# Altium PCB board.PcbDoc
Units mil, origin at the board's own origin, x right, y up, seen from the top; angles counter-clockwise.
Board outline 314.96 x 1874.02 mil, 2 copper layers (Top, Bottom), stack 61.9 mil thick; 26 components, 24 nets, 115 pads, 38 vias.
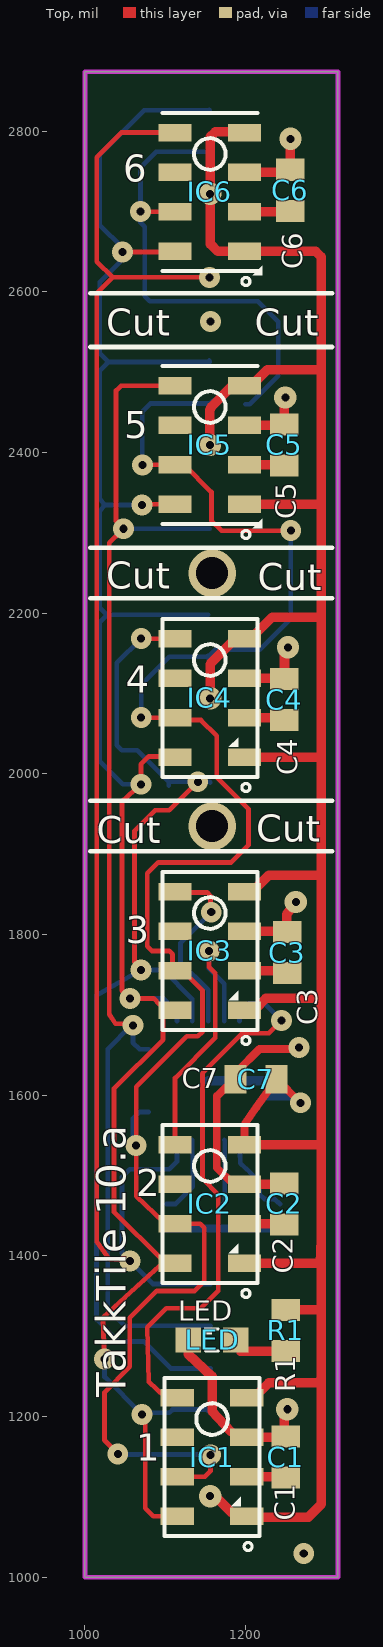
[diagram p0: Top view]
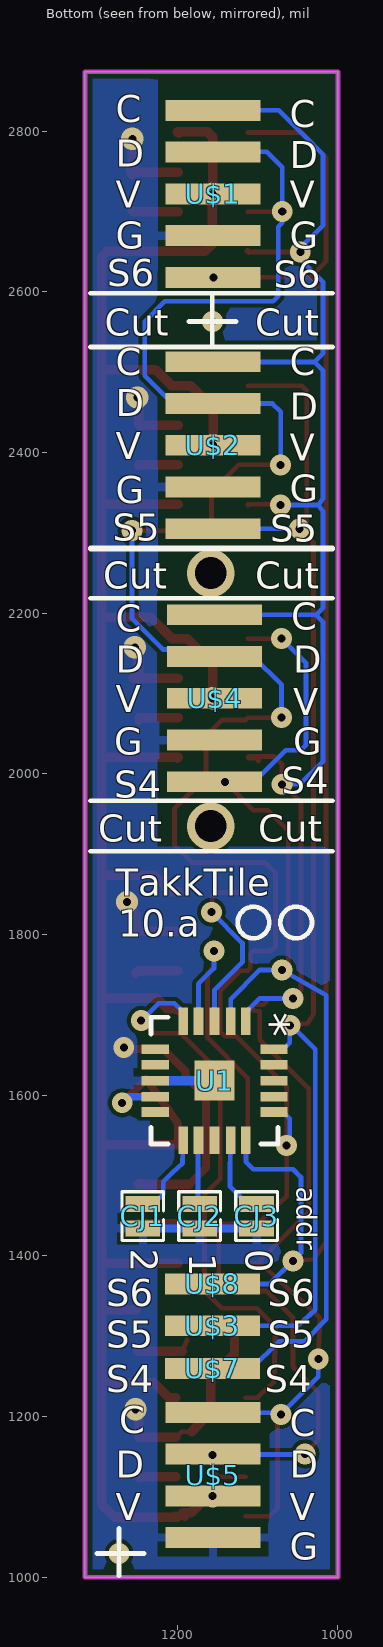
[diagram p1: Bottom view, seen from below]

## Layer stack, top to bottom
Top Solder: solder mask 0.4, Solder Resist, Dk 3.5
Top: signal copper 1.4
Dielectric 1: core 59.1, FR-4, Dk 4.8
Bottom: signal copper 1.4
Bottom Solder: solder mask 0.4, Solder Resist, Dk 3.5

## Board outline
1000,1000 1314.96,1000 1314.96,2874.02 1000,2874.02

## Design rules (kind name [scope] priority, off if disabled: settings)
Clearance [All] p1: gap=5 except(0: SMDPad-SMDPad SMDPad-THPad SMDPad-Via; 6: Track-Via THPad-Via Via-Via)
Clearance "Clearance (Same Net)" [All] p2: gap=0 except(5: SMDPad-SMDPad SMDPad-THPad; 6: SMDPad-Via)
ComponentClearance [All] p1: gap=5 collisioncheckmode=3 verticalgap=5 showdistances=FALSE
HoleSize [All] p1: absolutevalues=TRUE maxlimit=100 minlimit=10 maxpercent=80.000 minpercent=20.000
HoleToHoleClearance mdViaViaSameLayer [All] p1: gap=8 allowstackedmicrovias=TRUE
HoleToHoleClearance [All] p2: gap=10 allowstackedmicrovias=TRUE
MinimumSolderMaskSliver [All] p1: minsoldermaskwidth=1
PasteMaskExpansion mlMinCreamFrame [All] p1: expansion=0
PasteMaskExpansion [All] p2: expansion=0
PolygonConnect ThermalVias [IsVia] p1: connectstyle=Direct reliefconductorwidth=10 reliefentries=4 polygonreliefangle="90 Angle" airgapwidth=10
PolygonConnect [All] p2: connectstyle=Relief reliefconductorwidth=10 reliefentries=4 polygonreliefangle="90 Angle" airgapwidth=10
RoutingVias [All] p1: holewidth=28 width=50 viastyle="Through Hole" minholewidth=10 minwidth=18 maxholewidth=28 maxwidth=50
SilkToSilkClearance [All] p1 off: silktosilkclearance=10
SilkToSolderMaskClearance [IsPad] p1 off: minsilkscreentomaskgap=10 clearancetoexposedcopper=TRUE
SolderMaskExpansion mlMinStopFrame [All] p1: expansion=2
SolderMaskExpansion [All] p2: expansion=4
Width Width_1 [All] p1: maxlimit=100000 minlimit=5 preferedwidth=10
Width [All] p2: maxlimit=10 minlimit=10 preferedwidth=10
23 further rules are at their usual default settings.

## Components (designator, comment, footprint, x,y, rotation, side; value= is the part's Value field where it differs from the comment)
C1 "1uF" C0402 1250.03,1149.61 r90 top
C2 "1uF" C0402 1248.03,1464.57 r90 top
C3 "1uF" C0402 1251.97,1777.56 r90 top
C4 "1uF" C0402 1248.03,2092.52 r90 top
C5 "1uF" C0402 1248.03,2409.45 r90 top
C6 "1uF" C0402 1255.91,2726.38 r90 top
C7 "4.7uf" C0402 1212.99,1620.08 r180 top
CJ1 "" 2_P 1242.92,1464.57 r0 bottom
CJ2 "" 2_P 1172.05,1464.57 r0 bottom
CJ3 "" 2_P 1101.18,1464.57 r0 bottom
IC1 "MPL115A2" MPL115A2 1158.27,1196.85 r180 top
IC2 "MPL115A2" MPL115A2 1155.51,1511.81 r180 top
IC3 "MPL115A2" MPL115A2 1155.51,1826.77 r180 top
IC4 "MPL115A2" MPL115A2 1155.51,2141.73 r180 top
IC5 "MPL115A2" MPL115A2 1155.51,2456.69 r180 top
IC6 "MPL115A2" MPL115A2 1155.51,2771.65 r180 top
LED "" SML0603 1158.27,1295.28 r0 top
R1 "120R" R0402 1250.22,1307.09 r90 top
U1 "ATTINY24A-MU-QFN20" QFN50P400X400X80-21N 1153.55,1618.11 r270 bottom
U$1 "" 5_PIN_CON 1155.51,2618.11 r180 bottom
U$2 "" 5_PIN_CON 1155.51,2305.12 r180 bottom
U$3 "" 1_PIN_CON 1156.3,1312.99 r180 bottom
U$4 "" 5_PIN_CON 1153.55,1990.16 r180 bottom
U$5 "" 4_PIN_CON 1155.51,1049.21 r180 bottom
U$7 "" 1_PIN_CON 1156.3,1259.84 r180 bottom
U$8 "1_PIN_CON" 1_PIN_CON 1156.3,1365 r180 bottom

## Footprints (in the part's own frame and the unit in brackets; to place one, negate y for a bottom-side part, rotate by r counter-clockwise, add the part's x,y. Pads: shape width x height; smd on the part's side, far side on the other; paste and mask are expansions set on the pad)
1_PIN_CON [mm] "1_PIN_CON"
  rect 3x0.66 smd: 1(0,0)
2_P [mil] "2_P"
  rect 43.31x19.69 smd: P$1(0,0) P$2(0,30.51)
  silkscreen extent -26,-15 26,45
4_PIN_CON [mm] "4_PIN_CON"
  rect 3x0.66 smd: 1(0,3.96) 2(0,2.64) 3(0,1.32) 4(0,0)
5_PIN_CON [mm] "5_PIN_CON"
  rect 3x0.66 smd: 1(0,5.28) 2(0,3.96) 3(0,2.64) 4(0,1.32) 5(0,0)
C0402 [mm] "C0402"
  rect 0.7x0.9 smd: 1(-0.65,0) 2(0.65,0)
MPL115A2 [mm] "MPL115A2"
  rect 1.05x0.55 smd: 1(-1.1,3.075) 2(-1.1,1.825) 3(-1.1,0.575) 4(-1.1,-0.675) 5(1.1,-0.675) 6(1.1,0.575) 7(1.1,1.825) 8(1.1,3.075)
  silkscreen extent -1.5,-1.3 1.5,4.16
QFN50P400X400X80-21N [mil] "QFN50P400X400X80-21N"
  rect 34x12 smd: 1(-74,39) 2(-74,20) 3(-74,0) 4(-74,-20) 5(-74,-39) 11(74,-39) 12(74,-20) 13(74,0) 14(74,20) 15(74,39)
  rect 12x34 smd: 6(-39,-74) 7(-20,-74) 8(0,-74) 9(20,-74) 10(39,-74) 16(39,74) 17(20,74) 18(0,74) 19(-20,74) 20(-39,74)
  rect 50x50 smd: 21(0,0)
  silkscreen extent -79,-79 79,79
R0402 [mm] "R0402"
  rect 0.7x0.9 smd: 1(-0.65,0) 2(0.65,0)
SML0603 [mil] "SML0603"
  rect 31.5x31.5 smd: A(29.53,0) C(-29.53,0)
  silkscreen extent -10,-14 8,16

## Part data
C1 C2 C3 C4 C5 C6 C7: library part C0402
CJ1 CJ2 CJ3: library part 2_P
LED: library part SML0603
R1: library part R0402
U1: library part QFN50P400X400X80-21N
U$1 U$2 U$4: library part 5_PIN_CON
U$3 U$7: library part 1_PIN_CON
U$5: library part 4_PIN_CON

## Via types
v1: diameter 26/26 (per signal layer), hole 10, Top to Bottom, tented both sides, 27 vias
v2: diameter 27.81/27.81 (per signal layer), hole 10, Top to Bottom, tented both sides, 9 vias
v3: diameter 59.05/59.05 (per signal layer), hole 39.37, Top to Bottom, 2 vias

## Nets (pads, with @x,y where several pads share a name; then routed paths per layer and width w, separated by ;. In a path a pad name is that pad's centre, name@x,y a point inside that pad or via, vN(x,y) a via of type N, cw(c..) or ccw(c..) an arc to the next point about the centre after c; other vN are vias at no path point)
GND: C1.2 C2.2 C3.2 C4.2 C5.2 C6.2 C7.2 CJ1.P$2 CJ2.P$2 CJ3.P$2 IC1.3 IC2.3 IC3.3 IC4.3 IC5.3 IC6.3 LED.C U1.8 U1.21 U$1.4 U$2.4 U$4.4 U$5.4 | length 1199.4
  Top w5.91: IC1.3@1181.89,1181.1 1194.69,1181.1 IC1.3
  Top w9.84: IC2.3@1184.85,1489.17 1164.18,1509.84 1164.18,1598.82 1164.57,1598.82 C7.2@1189.77,1624.02 ; C7.2 1189.77,1622.44 C7.2@1189.77,1624.02 ; v1(1266.54,1659.45) 1264.57,1657.48 1217.33,1657.48 1189.77,1629.92 C7.2@1189.77,1624.02
  Top w11.81: LED.C 1128.74,1277.56 1158.27,1250 1158.27,1206.69 IC1.3@1181.89,1181.1 ; IC2.3@1184.85,1489.17 IC2.3 1249.02,1489.17 C2.2 ; IC3.3 C3.2@1249.02,1804.13 ; IC4.3 1247.05,2119.09 C4.2 ; IC5.3@1198.82,2434.06 1247.05,2434.06 C5.2 1248.03,2462.99 v2(1249.61,2468.5) ; IC6.3 C6.2@1252.96,2749.02 ; IC1.3 1247.05,1174.21 1248.03,1175.2 1248.03,1205.12 v2(1251.97,1209.06) ; v2(1252.76,2157.48) v2@1249.02,2153.74 ; C4.2@1254.92,2119.09 C4.2@1249.02,2119.09 ; C6.2@1255.91,2746.06 C6.2@1252.96,2749.02 ; v2(1255.91,2790.55) C6.2 C6.2@1252.96,2749.02 ; C3.2@1256.11,1804.13 C3.2@1250.99,1804.13 ; v2(1262.6,1840.55) 1250.99,1825 C3.2@1250.99,1804.13 ; C4.2 1248.03,2152.76 v2@1249.02,2153.74 ; C4.2 C4.2@1249.02,2119.09 ; C3.2@1249.02,1804.13 C3.2@1250.99,1804.13 ; C3.2@1249.02,1804.13 C3.2 C3.2@1250.99,1804.13 ; C4.2@1249.02,2119.09 v2@1249.02,2153.74
  Top w16: C6.2@1255.91,2749.02 C6.2
  Bottom w9.84: CJ3.P$2 CJ2.P$2 CJ1.P$2
  Bottom w11.81: U1.21 U1.8 ; v2@1255.51,2790.16 v2(1255.91,2790.55)
N$1: C1.1 IC1.2 | length 46.9
  Top w11.81: IC1.2 1247.05,1125 C1.1@1248.03,1124.02
N$2: C5.1 IC5.2 | length 49.6
  Top w11.81: IC5.2 1247.05,2384.84 C5.1
N$3: C2.1 IC2.2 | length 49.6
  Top w11.81: IC2.2 1247.05,1439.96 C2.1
N$4: C6.1 IC6.2 | length 57.5
  Top w11.81: IC6.2 1254.92,2699.8 C6.1
N$5: C3.1 IC3.2 | length 54
  Top w11.81: IC3.2 1247.05,1754.92 C3.1
N$6: CJ3.P$1 U1.14 | length 100.2
  Bottom w5.91: CJ3.P$1 1112.99,1464.57 1134.33,1485.91 1134.33,1507.56 U1.14
N$7: C4.1 IC4.2 | length 51.3
  Top w11.81: IC4.2 1247.05,2069.88 C4.1
N$8: CJ2.P$1 U1.12 | length 80.6
  Bottom w5.91: CJ2.P$1 1174.02,1466.54 1174.02,1543.8 U1.12
N$9: CJ1.P$1 U1.11 | length 108
  Bottom w5.91: U1.11 1193.33,1515.33 1205.51,1503.94 1217.33,1492.13 1217.33,1476.77 1223.23,1470.87 1235.83,1470.87 CJ1.P$1
N$10: 
N$11: LED.A R1.1 | length 70.9
  Top w5.91: LED.A LED.A@1193.7,1281.1
  Top w11.81: LED.A@1193.7,1281.1 R1.1@1249.22,1281.5
N$12: 
N$13: 
RESET: U1.13
RST01: IC1.5 U1.5 | length 704.2
  Top w5.91: IC1.5@1112.4,1223.23 IC1.5 1099.22,1223.43 1099.22,1224.41 1079.53,1243.11 1077.56,1311.02 1101.18,1334.65 1144.49,1334.65 1166.14,1356.3 1166.14,1476.38 1146.46,1496.06 1146.46,1627.95 1195.67,1677.17 1229.14,1677.17 v1(1244.88,1692.91)
  Bottom w5.91: U1.5 1192.55,1703.57 1203.55,1714.57 1223.23,1714.57 v1(1244.88,1692.91)
RST02: IC2.5 U1.4 | length 362.5
  Top w5.91: IC2.5 1112.21,1621.26 1162.21,1671.26 1162.21,1751.97 1154.33,1759.84 v1(1154.33,1779.53)
  Bottom w5.91: v1@1154.33,1781.5 v1(1154.33,1779.53) 1154.33,1757.87 1173.55,1738.66 U1.4
RST03: IC3.5 U1.3 | length 256.4
  Top w5.91: IC3.5@1101.97,1852.36 1152.36,1852.36 1156.3,1848.43 1156.3,1828.74 v1(1157.29,1827.76)
  Top w7.87: IC3.5@1101.97,1852.36 1111.22,1852.36 IC3.5@1112.21,1853.35
  Bottom w5.91: U1.3 1153.55,1731.1 1118.9,1765.75 1118.9,1789.37 v1(1157.29,1827.76) ; v1@1156.3,1826.77 v1(1157.29,1827.76) ; v1@1158.27,1828.74 v1(1157.29,1827.76)
RST04: IC4.5 U1.2 U$4.5 U$7.1 | length 1362.3
  Top w5.91: v1(1069.69,1755.91) 1069.69,1757.87 1061.81,1765.75 1061.81,1929.13 1087.4,1954.72 1105.12,1954.72 v1(1140.55,1990.16) ; v1(1070.08,2168.5) 1070.28,2168.31 IC4.5
  Bottom w5.91: v1(1070.08,2168.5) 1039.77,2138.19 1039.77,2035.83 1046.07,2029.53 1064.96,2029.53 U$4.5@1104.33,1990.16 ; U$4.5@1104.33,1985.43 U$4.5@1104.33,1990.16 ; U1.2 1133.55,1719.61 1097.25,1755.91 v1(1069.69,1755.91) 1014.57,1724.41 1014.57,1320.87 1042.13,1293.31 1073.62,1293.31 1107.09,1259.84 U$7.1 ; U$4.5@1155.91,1989.37 1155.12,1990.16 U$4.5 ; U$4.5@1104.33,1990.16 v1(1140.55,1990.16) ; v1(1140.55,1990.16) 1140.55,1990.94 U$4.5 ; v1(1140.55,1990.16) U$4.5
RST05: IC5.5 U1.20 U$2.5 U$3.1 | length 1568.4
  Top w5.91: 1038.19,2295.28 v1(1048.03,2305.12) ; v1(1059.85,1687.01) 1057.88,1688.98 1038.19,1688.98 1030.32,1700.79 1030.32,2287.4 v1(1048.03,2305.12) ; IC5.5 1045,2483.27 1038.82,2477.09 1038.82,2314.33 v1(1048.03,2305.12)
  Bottom w5.91: v1(1048.03,2305.12) U$2.5 ; v1@1057.88,1687.01 1028.35,1657.48 1028.35,1332.68 1050,1312.99 U$3.1 ; v1(1059.85,1687.01) 1059.85,1665.35 1068.09,1657.11 U1.20
RST06: IC6.5 U1.15 U$1.5 U$8.1 | length 1977
  Top w5.91: v1(1055.91,1393.7) 1030.63,1395.67 1014.88,1417.32 1014.88,2598.43 1034.57,2618.11 ; IC6.5 1112.01,2798.43 1045.59,2798.43 1014.88,2767.72 1014.88,2637.8 1034.57,2618.11 ; v1(1155.12,2618.11) 1034.57,2618.11
  Bottom w5.91: U1.15 1114.55,1517.3 1105.12,1507.87 1055.91,1507.87 1046.07,1498.03 1046.07,1403.54 v1(1055.91,1393.7) 1084.61,1365 U$8.1 ; v1(1155.12,2618.11) 1155.51,2616.93 U$1.5 U$1.5@1156.3,2617.32
SCL: IC1.8 IC2.8 IC3.8 IC4.8 IC5.8 IC6.8 U1.1 U$1.1 U$2.1 U$4.1 U$5.1 | length 2878.3
  Top w5.91: v1(1024.41,1271.65) 1022.44,1322.83 1050,1348.43 1093.31,1387.8 1109.06,1389.57 IC2.8 1105.32,1390.75 1095.48,1393.5 1097.25,1393.7 1036.22,1454.72 1036.22,1608.27 1097.25,1669.29 1097.25,1704.53 IC3.8 ; v1(1046.85,2649.61) IC6.8@1111.22,2649.61 ; v1@1068.51,1981.1 v1(1069.69,1987.01) ; v1(1071.26,2334.65) 1072.25,2335.63 IC5.8 1111.22,2334.65 IC5.8@1111.81,2334.65 ; v1@1075.2,1202.36 v1(1070.87,1202.76) 1075.2,1198.43 1075.2,1085.83 1085.24,1075.79 IC1.8 ; IC4.8@1098.82,2016.14 1098.82,2019.69 1111.22,2019.69 IC4.8 ; IC4.8@1100.99,2020.67 IC4.8 ; IC3.8@1105.12,1706.69 1111.22,1706.69 IC3.8 ; IC3.8@1112.99,1704.92 IC3.8 ; v1(1069.69,1987.01) 1069.69,2011.81 1079.53,2021.65 1111.22,2021.65 IC4.8 ; v1(1069.69,1987.01) 1046.07,1965.35 1046.07,1730.32 v1(1055.91,1720.47) 1085.44,1720.47 1093.21,1712.7 1105.22,1712.7 IC3.8
  Top w7.87: IC6.8@1111.22,2649.61 IC6.8
  Bottom w5.91: v1(1024.41,1271.65) 1024.41,1249.21 v1(1070.87,1202.76) 1072.84,1204.72 1105.12,1204.72 1109.06,1208.66 1151.97,1208.66 U$5.1 U$5.1@1156.3,1205.91 ; v1(1055.91,1720.47) 1097.44,1720.47 1114.55,1703.37 U1.1 ; v1(1069.69,1987.01) 1047.25,1987.01 1018.51,2015.75 1018.51,2188.98 1027.56,2198.03 ; v1@1071.66,2334.65 v1(1071.26,2334.65) 1024.41,2334.65 ; U$4.1 1027.56,2198.03 ; U$1.1@1154.73,2826.77 U$1.1 1073.62,2825.98 1018.51,2770.87 1018.51,2683.07 1046.85,2654.72 v1(1046.85,2649.61) 1046.85,2640.55 1018.51,2612.2 1018.51,2523.62 1028.35,2513.78 ; U$2.1 1155.51,2513.78 1154.73,2514.57 1155.51,2512.6 1029.53,2512.6 1028.35,2513.78 ; 1024.41,2334.65 1018.51,2326.77 1018.51,2206.69 1027.17,2198.03 1027.56,2198.03 ; 1024.41,2334.65 1018.51,2342.52 1018.51,2501.97 1027.56,2511.02 1027.56,2511.81 1028.35,2513.78
SDA: IC1.7 IC2.7 IC3.7 IC4.7 IC5.7 IC6.7 U1.16 U$1.2 U$2.2 U$4.2 U$5.2 | length 2992.8
  Top w5.91: v1(1069.29,2700) 1069.49,2699.8 IC6.7 ; v1(1070.08,2070.08) 1070.28,2069.88 IC4.7 1115.16,2066.93 1144.49,2066.93 1164.18,2047.24 1164.18,1996.06 1203.55,1956.69 1203.55,1911.42 1181.89,1889.76 1091.34,1889.76 1077.56,1875.98 1077.56,1785.43 1083.47,1779.53 1105.12,1779.53 1109.06,1775.59 1109.06,1757.87 1112.01,1754.92 1121.85,1754.92 1146.46,1730.32 1146.46,1679.13 1140.55,1673.23 1126.77,1673.23 1063.78,1610.24 v1(1063.78,1537.4) 1063.78,1474.41 1098.23,1441.93 IC2.7 1143.51,1439.96 1148.43,1435.04 1148.43,1368.11 1136.62,1356.3 1089.37,1356.3 1055.91,1322.83 1055.91,1261.81 1024.41,1230.32 1024.41,1170.47 v1(1040.95,1153.54) ; v1(1071.66,2384.65) 1072.64,2384.84 1123.43,2384.84 1157.48,2350.79 1157.48,2315.35 1170.08,2302.76 v1(1256.3,2302.76) ; IC1.7 1149.41,1125 1156.3,1131.89 v1(1156.3,1152.36) ; v1(1040.95,1153.54) 1037.01,1151.57 1043.7,1154.72 v1(1040.95,1153.54)
  Bottom w5.91: v1(1040.95,1153.54) 1039.37,1152.76 1155.91,1152.76 v1(1156.3,1152.36) 1161.03,1153.15 U$5.2 ; v1(1063.78,1537.4) 1059.85,1541.34 1059.85,1570.87 1068.09,1579.11 U1.16 ; v1(1070.08,2070.08) 1070.08,2110.63 1105.12,2145.67 U$4.2@1153.15,2145.67 ; v1(1071.66,2384.65) 1071.26,2385.04 1071.26,2450.79 1081.5,2461.02 U$2.2 U$2.2@1159.06,2464.57 ; U$4.2 1162.21,2154.72 1217.67,2154.72 1256.3,2193.35 v1(1256.3,2302.76) ; U$1.2 1155.12,2774.41 1088.59,2774.41 1069.29,2755.12 v1(1069.29,2700) 1069.29,2686.22 1074.41,2681.1 1074.41,2594.49 1080.71,2588.19 1215.36,2588.19 1240.55,2562.99 1240.55,2495.55 1205,2460 U$2.2@1200,2460
  Bottom w7.87: U$4.2@1153.15,2145.67 U$4.2
VCC: C7.1 IC1.1 IC1.4 IC2.1 IC2.4 IC3.1 IC3.4 IC4.1 IC4.4 IC5.1 IC5.4 IC6.1 IC6.4 R1.2 U1.9 U$1.3 U$2.3 U$4.3 U$5.3 | length 3425.7
  Top w5.91: R1.2@1248.43,1332.68 R1.2@1250.79,1332.68
  Top w7.87: IC1.1@1190.36,1075.79 IC1.1
  Top w9.84: IC2.4 1198.82,1562.99 1199.61,1564.96 1213.39,1585.04 C7.1 1268.11,1590.55 v1(1268.51,1590.55)
  Top w11.81: v2@1155.12,2409.06 v2(1155.51,2409.45) ; v2(1155.91,1100.79) 1159.06,1099.61 1163.39,1099.61 1183.07,1079.92 1192.92,1079.92 1190.36,1077.36 IC1.1@1190.36,1075.79 ; v2(1155.91,2094.09) 1155.91,2136.61 1187.6,2168.31 IC4.4 1206.5,2168.31 1233.07,2194.88 1294.1,2194.88 ; v2@1157.09,2407.48 1155.51,2409.06 1157.09,2409.06 v2(1155.51,2409.45) ; IC6.4@1197.84,2797.24 IC6.4 1199.81,2799.21 1162.21,2799.21 1155.91,2792.91 v2(1155.91,2722.05) 1155.51,2723.62 1155.51,2722.05 1156.3,2721.26 1156.3,2659.45 1165.16,2650.59 IC6.1 1287.21,2650.59 1294.1,2643.7 1294.1,2505.91 ; IC2.1 1293.11,1390.75 1294.1,1421.26 ; IC2.4 1294.1,1538.39 ; IC3.1 1200.59,1707.48 1212.21,1707.48 1225.2,1720.47 1294.1,1720.47 ; IC5.1 1293.11,2335.63 1294.1,2336.61 ; IC3.4@1199.81,1852.36 1198.82,1853.35 1208.47,1853.35 1229.14,1874.02 1294.1,1874.02 ; IC4.1@1199.81,2019.69 IC4.1 1293.11,2020.67 1294.1,2021.65 ; IC1.1 1199.81,1074.8 1278.35,1074.8 1294.1,1090.55 1294.1,1246.06 ; IC1.4 1210.44,1223.43 1229.14,1242.13 1290.16,1242.13 1294.1,1246.06 ; R1.2@1250.79,1332.68 1294.1,1332.68 ; v2(1155.51,2409.45) 1155.12,2409.84 1155.12,2453.54 1157.48,2455.91 1157.48,2457.09 1183.66,2483.27 IC5.4 1207.29,2483.27 1227.17,2503.15 1291.34,2503.15 1294.1,2505.91 ; 1294.1,1246.06 1294.1,1332.68 ; 1294.1,1332.68 1294.1,1421.26 ; 1294.1,1421.26 1294.1,1538.39 ; 1294.1,1538.39 1294.1,1720.47 ; 1294.1,1720.47 1294.1,1874.02 ; 1294.1,1874.02 1294.1,2021.65 ; 1294.1,2021.65 1294.1,2194.88 ; 1294.1,2194.88 1294.1,2336.61 ; 1294.1,2336.61 1294.1,2505.91
  Bottom w9.84: U1.9 1264.88,1598.11 v1(1268.51,1590.55)
  Bottom w11.81: U$4.3 v2(1155.91,2094.09) ; U$5.3 1154.73,1101.18 v2(1155.91,1100.79) ; U$2.3 1157.48,2411.02 v2(1155.51,2409.45) ; U$1.3 1156.3,2722.83 v2(1155.91,2722.05)
pads on no net: IC1.6 IC2.6 IC3.6 IC4.6 IC5.6 IC6.6 U1.6 U1.7 U1.10 U1.17 U1.18 U1.19
copper on no net:
  other v1: 1272.44,1029.53 1156.3,2562.99
  other v3: 1158.27,1935.04 1158.27,2250

## Polygon pours and split planes (outlines as drawn)
GND on Bottom "GND" (solid, pour order 2): 1010,1010 1305,1010 1305,2865 1010,2865 1010,1010

## Keep-outs
Keep-Out Layer:
  the board outline again, w5.91

## Other copper
Bottom:
  pour cut-out: 1232.55,1697.11 1235,1655 1195,1655 1195,1585 1235,1585 1232.55,1539.11 1074.55,1539.11 1075,1539.56 1075,1700 1229.66,1700
  pour cut-out: 1224.96,2018.35 1224.96,1910.12 1225.8,1909.28 1225.77,1909.25 1018.91,1909.25 1018.91,2013 1024.81,2018.9
  pour cut-out: 1224.57,2334.1 1224.57,2225.86 1225.4,2225.03 1225.37,2225 1018.51,2225 1018.51,2328.75 1024.41,2334.65
  pour cut-out: 1224.57,2647.09 1219.58,2647.09 1215.36,2642.87 1215.36,2588.19 1219.84,2588.19 1225,2593.35 1225,2598.43
  pour cut-out: 1224.96,2065.11 1225.4,2065.55 1225.4,2225.03 1010.4,2225.03 1010.4,2030.03 1080.4,2030.03 1080.4,2065.03 1080.48,2065.11
  pour cut-out: 1224.57,2380.08 1225,2380.51 1225,2540 1010,2540 1010,2345 1080,2345 1080,2380 1080.08,2380.08
  pour cut-out: 1224,2693.64 1224,2864 1011,2864 1010,2865 1010,2694 1223.63,2694
  pour cut-out: 1219.58,2603.57 1219.58,2648 1091,2648 1091,2603 1219.01,2603 1219.65,2603
  pour cut-out: 1225,1075 1085,1075 1085,1390 1090,1390 1225,1390

## Silkscreen, mask and mechanical layers (free items; w line width, h text height)
Top Overlay:
  lines w5.91: 1006.7,1903.54 1307.88,1903.54 ; 1006.7,1966.54 1307.88,1966.54 ; 1006.7,2218.5 1307.88,2218.5 ; 1006.7,2281.5 1307.88,2281.5 ; 1006.7,2531.5 1307.88,2531.5 ; 1006.7,2598.43 1307.88,2598.43
  text "6" at 1048,2737 h33.46
  text "C6" at 1270.48,2627.95 h25.1 r90
  text "Cut" at 1026.38,2545.28 h33.46
  text "Cut" at 1211.42,2545.28 h33.46
  text "5" at 1049,2418 h33.46
  text "C5" at 1262.6,2316.93 h25.1 r90
  text "Cut" at 1026.38,2230.31 h33.46
  text "Cut" at 1215.36,2228.35 h33.46
  text "4" at 1051,2101 h33.46
  text "C4" at 1264.57,1998.03 h25.1 r90
  text "Cut" at 1213.39,1915.35 h33.46
  text "Cut" at 1014.57,1913.39 h33.46
  text "3" at 1051,1789 h33.46
  text "C3" at 1289,1687 h25.1 r90
  text "C7" at 1120.39,1608.77 h25.1
  text "2" at 1063.78,1474.41 h33.46
  text "C2" at 1259,1378 h25.1 r90
  text "LED" at 1116,1319 h25.1
  text "R1" at 1262,1230 h25.1 r90
  text "TakkTile 10.a" at 1051,1224 h36.81 r90
  text "1" at 1064,1145 h33.46
  text "C1" at 1261,1070 h25.1 r90
Bottom Overlay:
  circle w5.91: c1051.97,1814.96 r19.69
  circle w5.91: c1105.12,1814.96 r19.69
  lines w5.91: 1006.7,1903.54 1307.88,1903.54 ; 1006.7,1966.54 1307.88,1966.54 ; 1006.7,2279.53 1307.88,2279.53 ; 1006.7,2281.5 1307.88,2281.5 ; 1006.7,2531.5 1307.88,2531.5 ; 1006.7,2598.43 1307.88,2598.43 ; 1126.77,2562.99 1185.83,2562.99 ; 1156.3,2535.43 1156.3,2594.49 ; 1240.95,1029.53 1300,1029.53 ; 1272.44,1001.97 1272.44,1061.02 ; 1006.7,2218.5 1307.88,2218.5 1006.7,2218.5
  text "C" at 1276.38,2811.02 h33.46
  text "C" at 1059.85,2805.12 h33.46
  text "D" at 1276.38,2755.91 h33.46
  text "D" at 1059.85,2753.94 h33.46
  text "V" at 1059.85,2704.72 h33.46
  text "V" at 1276.38,2704.72 h33.46
  text "G" at 1059.85,2653.54 h33.46
  text "G" at 1276.38,2653.54 h33.46
  text "S6" at 1287,2607 h33.46
  text "S6" at 1080,2605 h33.46
  text "Cut" at 1103.15,2545.28 h33.46
  text "Cut" at 1290.16,2545.28 h33.46
  text "C" at 1059.85,2496.06 h33.46
  text "C" at 1276.38,2496.06 h33.46
  text "D" at 1276.38,2444.88 h33.46
  text "D" at 1059.85,2440.94 h33.46
  text "V" at 1276.38,2391.73 h33.46
  text "V" at 1059.85,2389.76 h33.46
  text "G" at 1059.85,2338.58 h33.46
  text "G" at 1276.38,2336.61 h33.46
  text "S5" at 1280,2290 h33.46
  text "S5" at 1084,2289 h33.46
  text "Cut" at 1103.15,2230.31 h33.46
  text "Cut" at 1292.13,2230.31 h33.46
  text "C" at 1057.88,2179.13 h33.46
  text "C" at 1276.38,2177.17 h33.46
  text "D" at 1055.91,2125.98 h33.46
  text "D" at 1276.38,2125.98 h33.46
  text "V" at 1276.38,2076.77 h33.46
  text "V" at 1055.91,2072.83 h33.46
  text "G" at 1055.91,2023.62 h33.46
  text "G" at 1278.35,2023.62 h33.46
  text "S4" at 1070,1975 h33.46
  text "S4" at 1278.35,1970.47 h33.46
  text "Cut" at 1099.22,1915.35 h33.46
  text "Cut" at 1298.03,1915.35 h33.46
  text "TakkTile" at 1276.38,1848.43 h33.46
  text "10.a" at 1273.38,1797.43 h33.46
  text "addr" at 1051,1486 h25.1 r90
  text "2" at 1258,1409 h33.46 r90
  text "0" at 1115,1408 h33.46 r90
  text "1" at 1185,1403 h33.46 r90
  text "S6" at 1087.4,1337.44 h33.46
  text "S6" at 1288.19,1337.44 h33.46
  text "S5" at 1087.4,1285.43 h33.46
  text "S5" at 1288.19,1285.43 h33.46
  text "S4" at 1091.34,1230.32 h33.46
  text "S4" at 1288.19,1230.32 h33.46
  text "C" at 1272.44,1179.13 h33.46
  text "C" at 1059.85,1175.2 h33.46
  text "D" at 1059.85,1124.02 h33.46
  text "D" at 1276.38,1124.02 h33.46
  text "V" at 1059.85,1070.87 h33.46
  text "V" at 1276.38,1070.87 h33.46
  text "G" at 1059.85,1021.65 h33.46
Dimension:
  the board outline again, w5.91
FabNotes:
  text "Fabrication Notes: / 1. Board should be 0.062\" thick / 2. Green Solder mask on top and bottom / 3. White silk screen on top and bottom / 4. HASL finish / 5. Board dimensions are 0.314\" x 1.874\"" at 1765,2330 h40
_tsilk:
  lines w5.91: 1006.7,1903.54 1307.88,1903.54 ; 1006.7,1966.54 1307.88,1966.54 ; 1006.7,2218.5 1307.88,2218.5 ; 1006.7,2281.5 1307.88,2281.5 ; 1006.7,2531.5 1307.88,2531.5 ; 1006.7,2598.43 1307.88,2598.43
  text "6" at 1065.1,2738.2 h33.46
  text "C6" at 1270.48,2627.95 h25.1 r90
  text "Cut" at 1026.38,2545.28 h33.46
  text "Cut" at 1211.42,2545.28 h33.46
  text "5" at 1065.1,2423.24 h33.46
  text "C5" at 1262.6,2316.93 h25.1 r90
  text "Cut" at 1026.38,2230.31 h33.46
  text "Cut" at 1215.36,2228.35 h33.46
  text "4" at 1065.1,2108.28 h33.46
  text "C4" at 1264.57,1998.03 h25.1 r90
  text "Cut" at 1213.39,1915.35 h33.46
  text "Cut" at 1014.57,1913.39 h33.46
  text "3" at 1065.1,1793.32 h33.46
  text "C3" at 1268.51,1679.13 h25.1 r90
  text "C7" at 1120.39,1608.77 h25.1
  text "2" at 1065.1,1478.36 h33.46
  text "C2" at 1264.57,1364.17 h25.1 r90
  text "LED" at 1134.67,1325.3 h25.1
  text "R1" at 1260.13,1242.13 h25.1 r90
  text "TakkTile" at 1075.59,1137.8 h36.81 r90
  text "C1" at 1262.6,1053.15 h25.1 r90
  text "1" at 1055.91,1050 h33.46
_bsilk:
  circle w5.91: c1105.12,1814.96 r19.69
  circle w5.91: c1051.97,1814.96 r19.69
  lines w5.91: 1006.7,1903.54 1307.88,1903.54 ; 1006.7,1966.54 1307.88,1966.54 ; 1006.7,2279.53 1307.88,2279.53 ; 1006.7,2281.5 1307.88,2281.5 ; 1006.7,2531.5 1307.88,2531.5 ; 1006.7,2598.43 1307.88,2598.43 ; 1126.77,2562.99 1185.83,2562.99 ; 1156.3,2535.43 1156.3,2594.49 ; 1240.95,1029.53 1300,1029.53 ; 1272.44,1001.97 1272.44,1061.02 ; 1006.7,2218.5 1307.88,2218.5 1006.7,2218.5
  text "C" at 1276.38,2811.02 h33.46
  text "C" at 1059.85,2805.12 h33.46
  text "D" at 1276.38,2755.91 h33.46
  text "D" at 1059.85,2753.94 h33.46
  text "V" at 1059.85,2704.72 h33.46
  text "V" at 1276.38,2704.72 h33.46
  text "G" at 1059.85,2653.54 h33.46
  text "G" at 1276.38,2653.54 h33.46
  text "S" at 1059.85,2598.43 h33.46
  text "S" at 1276.38,2598.43 h33.46
  text "Cut" at 1103.15,2545.28 h33.46
  text "Cut" at 1290.16,2545.28 h33.46
  text "C" at 1059.85,2496.06 h33.46
  text "C" at 1276.38,2496.06 h33.46
  text "D" at 1276.38,2444.88 h33.46
  text "D" at 1059.85,2440.94 h33.46
  text "V" at 1276.38,2391.73 h33.46
  text "V" at 1059.85,2389.76 h33.46
  text "G" at 1059.85,2338.58 h33.46
  text "G" at 1276.38,2336.61 h33.46
  text "S" at 1091.34,2283.46 h33.46
  text "S" at 1246.85,2283.46 h33.46
  text "Cut" at 1103.15,2230.31 h33.46
  text "Cut" at 1292.13,2230.31 h33.46
  text "C" at 1057.88,2179.13 h33.46
  text "C" at 1276.38,2177.17 h33.46
  text "D" at 1055.91,2125.98 h33.46
  text "D" at 1276.38,2125.98 h33.46
  text "V" at 1276.38,2076.77 h33.46
  text "V" at 1055.91,2072.83 h33.46
  text "G" at 1055.91,2023.62 h33.46
  text "G" at 1278.35,2023.62 h33.46
  text "S" at 1055.91,1970.47 h33.46
  text "S" at 1278.35,1970.47 h33.46
  text "Cut" at 1099.22,1915.35 h33.46
  text "Cut" at 1298.03,1915.35 h33.46
  text "TakkTile" at 1276.38,1848.43 h33.46
  text "2" at 1256.7,1372.05 h33.46
  text "0" at 1116.93,1370.08 h33.46
  text "1" at 1187.8,1370.08 h33.46
  text "address" at 1260.63,1338.58 h25.1
  text "S5" at 1087.4,1285.43 h33.46
  text "S5" at 1288.19,1285.43 h33.46
  text "S4" at 1091.34,1230.32 h33.46
  text "S4" at 1288.19,1230.32 h33.46
  text "C" at 1272.44,1179.13 h33.46
  text "C" at 1059.85,1175.2 h33.46
  text "D" at 1059.85,1124.02 h33.46
  text "D" at 1276.38,1124.02 h33.46
  text "V" at 1059.85,1070.87 h33.46
  text "V" at 1276.38,1070.87 h33.46
  text "G" at 1059.85,1021.65 h33.46

## Text inside footprints (layer, text, board x,y; h text height)
U1: Bottom Overlay "*" at 1118.55,1703.11 h77.5 r90